# Altium PCB Strain gauge.PcbDoc
Units mil, origin at the board's own origin, x right, y up, seen from the top; angles counter-clockwise.
Board outline 2887.01 x 1499.61 mil, 2 copper layers (Top, Bottom); 10 components, 20 nets, 88 pads, 0 vias.
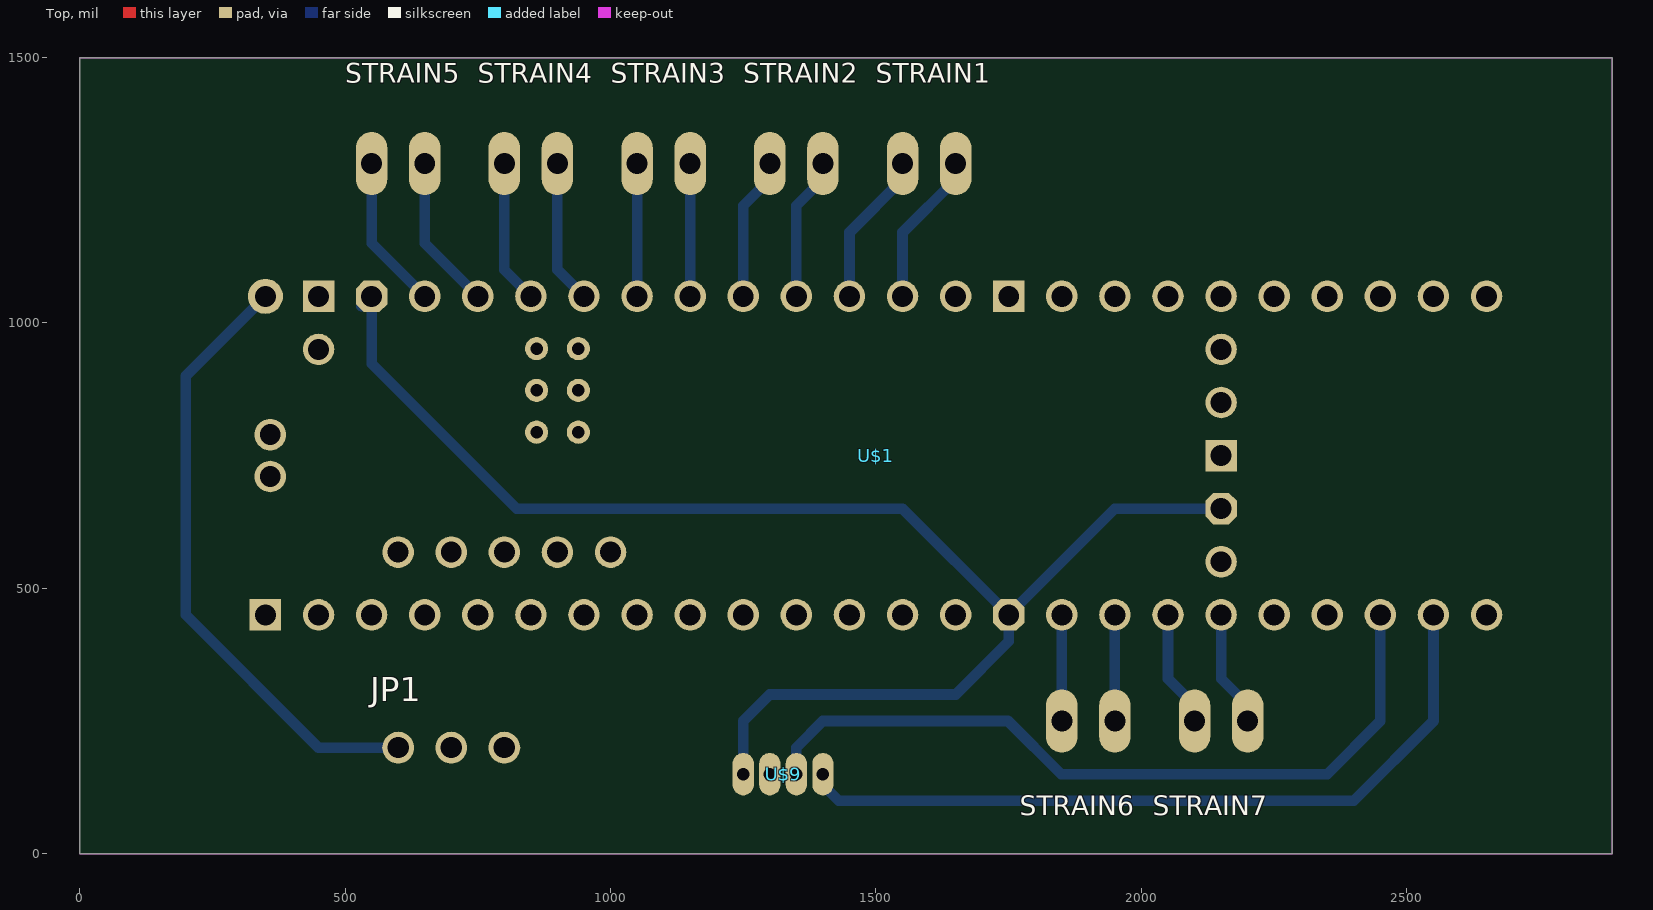
[diagram p0: Top view]
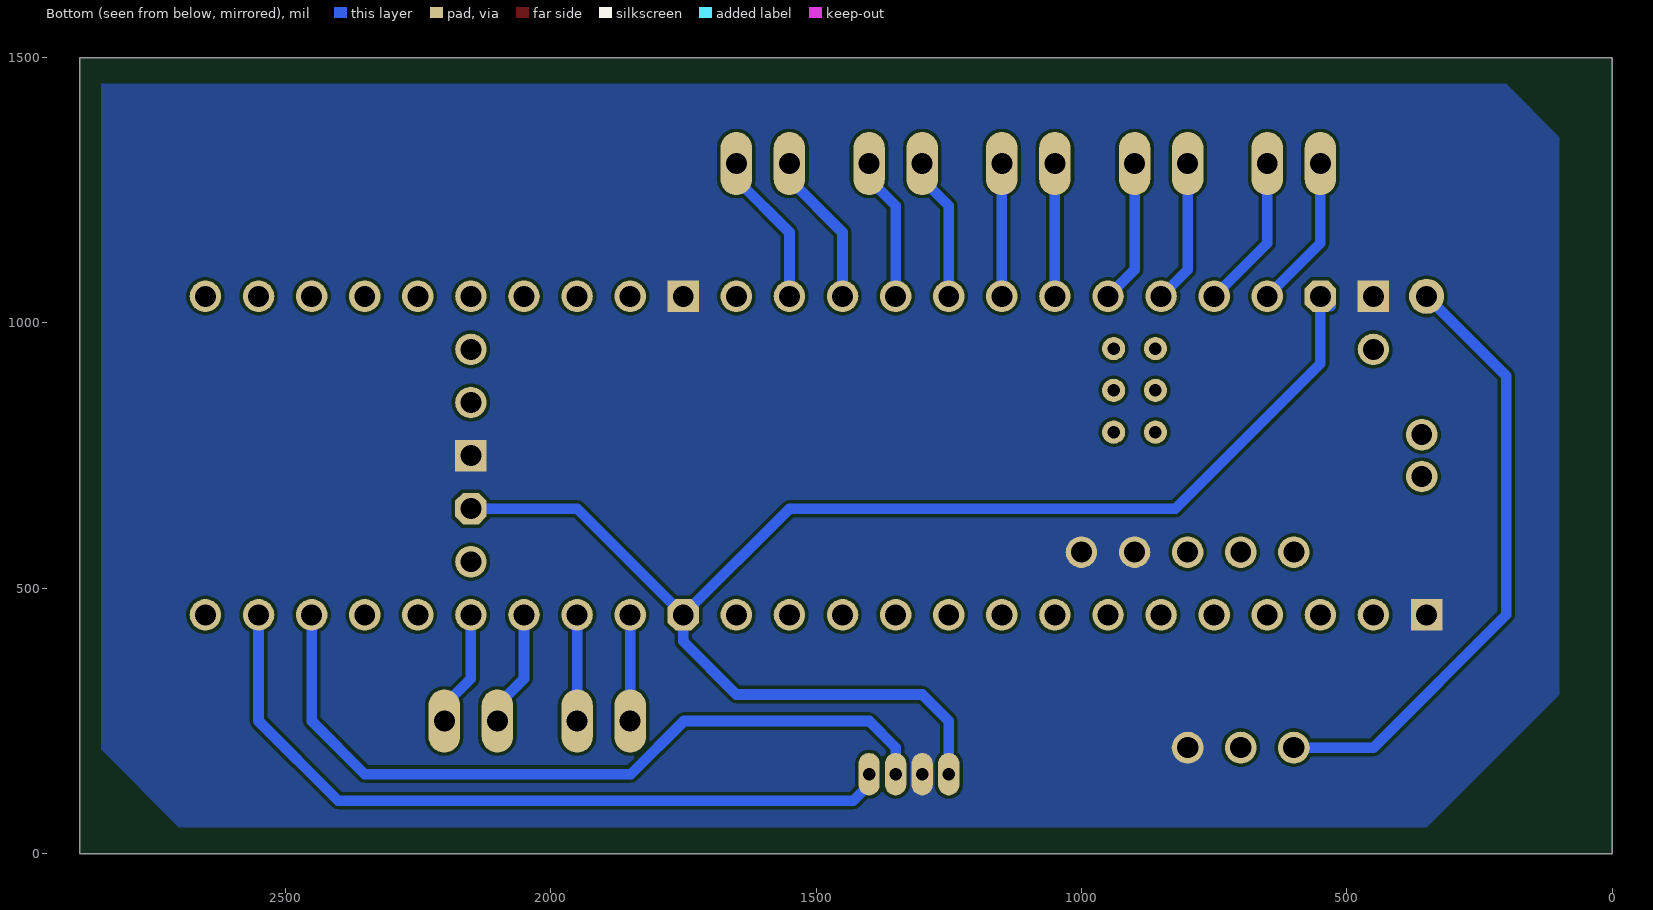
[diagram p1: Bottom view, seen from below]

## Layer stack, top to bottom
Top Solder: solder mask 0.4, Solder Resist, Dk 3.5
Top: signal copper 1.378
Dielectric 1: dielectric 12.6, FR-4, Dk 4.8
Bottom: signal copper 1.378
Bottom Solder: solder mask 0.4, Solder Resist, Dk 3.5

## Board outline
0,1499.61 0,0 2887.01,0 2887.01,1499.61

## Design rules (kind name [scope] priority, off if disabled: settings)
BoardOutlineClearance mdCopperDimension [All] p1: gap=10 ignorepadtopadclearanceinfootprint=FALSE except(0: Arc-SplitContinuation Track-SplitContinuation SMDPad-SplitContinuation THPad-SplitContinuation Via-SplitContinuation Fill-SplitContinuation Poly-SplitContinuation Region-SplitContinuation Text-SplitContinuation; 40: Poly-OutlineEdge Poly-CavityEdge Poly-CutoutEdge Poly-SplitBarrior)
Clearance "Clearance (Same Net)" [All] p1: gap=6 ignorepadtopadclearanceinfootprint=FALSE
Clearance [All] p2: gap=6 ignorepadtopadclearanceinfootprint=FALSE
HoleSize [All] p1: absolutevalues=TRUE maxlimit=100000 minlimit=13.78 maxpercent=80.000 minpercent=20.000
HoleToHoleClearance mdDrill [All] p1: gap=6 allowstackedmicrovias=TRUE
MinimumSolderMaskSliver [All] p1 off: minsoldermaskwidth=10
PasteMaskExpansion mlMinCreamFrame [All] p1: expansion=0
PolygonConnect PolygonConnect_For_PolygonThermal_ON_Width60000_Gap100000 [InPolygonClass('PolygonThermal_ON_Width60000_Gap100000') vs Not IsVia] p1: connectstyle=Relief reliefconductorwidth=6 reliefentries=4 polygonreliefangle="90 Angle" airgapwidth=10
PolygonConnect ThermalVias [IsVia] p2: connectstyle=Direct reliefconductorwidth=10 reliefentries=4 polygonreliefangle="90 Angle" airgapwidth=10
PolygonConnect [All] p3: connectstyle=Relief reliefconductorwidth=10 reliefentries=4 polygonreliefangle="90 Angle" airgapwidth=10
RoutingVias [All] p1: holewidth=13.78 width=29.78 viastyle="Through Hole" minholewidth=13.78 minwidth=29.78 maxholewidth=100 maxwidth=100
SolderMaskExpansion mlMinStopFrame [All] p1: expansion=4 istentingtop=FALSE
Width [All] p1: maxlimit=50 minlimit=12 preferedwidth=20 minimp=50.000000 maximp=50.000000 favimp=50.000000
26 further rules are at their usual default settings.

## Components (designator, comment, footprint, x,y, rotation, side; value= is the part's Value field where it differs from the comment)
JP1 "" 1X03 700,200 r0 top
STRAIN1 "22-23-2021" 22-23-2021 1600,1300 r0 top
STRAIN2 "22-23-2021" 22-23-2021 1350,1300 r0 top
STRAIN3 "22-23-2021" 22-23-2021 1100,1300 r0 top
STRAIN4 "22-23-2021" 22-23-2021 850,1300 r0 top
STRAIN5 "22-23-2021" 22-23-2021 600,1300 r0 top
STRAIN6 "22-23-2021" 22-23-2021 1900,250 r180 top
STRAIN7 "22-23-2021" 22-23-2021 2150,250 r180 top
U$1 "" TEENSY41 1550,750 r0 top
U$9 "" CAN_TEN 1150,100 r0 top

## Footprints (in the part's own frame and the unit in brackets; to place one, negate y for a bottom-side part, rotate by r counter-clockwise, add the part's x,y. Pads: shape width x height; smd on the part's side, far side on the other; paste and mask are expansions set on the pad)
1X03 [mil] "1X03"
  round 60 hole 40: 1(-100,0) 2(0,0) 3(100,0)
22-23-2021 [mm] "22-23-2021"
  oval 1.508x3.016 hole 1: 1(-1.27,0) 2(1.27,0)
CAN_TEN [mil] "CAN_TEN"
  oval 40x80 / inner oval 43.62x87.24 / far side oval 40x80 hole 23.62: P$1(100,50) P$2(150,50) P$3(200,50) P$4(250,50)
TEENSY41 [mm] "TEENSY41"
  round 1.508 hole 1: 0-RX1/CS1/CRX2(-27.94,-7.62) 1-TX1/MISO1/CTX2(-25.4,-7.62) 2-OUT2(-22.86,-7.62) 3-LRCLK2(-20.32,-7.62) 4-BCLK2(-17.78,-7.62) 5-IN2(-15.24,-7.62) 6-OUT1D(-12.7,-7.62) 7-RX2/OUT1A(-10.16,-7.62) 8-TX2/IN2(-7.62,-7.62) 9-OUT1C(-5.08,-7.62) 10-CS\MQSR(-2.54,-7.62) 11-MOSI/CTX1(0,-7.62) 12-MISO/MQSL(2.54,-7.62) 13-SCK/LED(2.54,7.62) 14-A0/TX3/SPDIF_OUT(0,7.62) 15-A1/RX3/SPDIF_IN(-2.54,7.62) 16-A2/RX4/SCL1(-5.08,7.62) 17-A3/TX4/SDA1(-7.62,7.62) 18-A4/SDA0(-10.16,7.62) 19-A5/SCL0(-12.7,7.62) 20-A6/TX5/LRCLK1(-15.24,7.62) 21-A7/RX5/BCLK1(-17.78,7.62) 22-A8/CTX1(-20.32,7.62) 23-A9/CRX1/MCLK1(-22.86,7.62) 24-A10/TX6/SCL2(7.62,-7.62) 25-A11/RX6/SDA2(10.16,-7.62) 26-A12/MOSI1(12.7,-7.62) 27-A13/SCK1(15.24,-7.62) 28-RX7(17.78,-7.62) 29-TX7(20.32,-7.62) 30-CRX3(22.86,-7.62) 31-CTX3(25.4,-7.62) 32-OUT1B(27.94,-7.62) 33-MCLK2(27.94,7.62) 34-RX8(25.4,7.62) 35-TX8(22.86,7.62) 36-PWM(20.32,7.62) 37-PWM(17.78,7.62) 38-A14/CS/IN1(15.24,7.62) 39-A15/CS/OUT1A(12.7,7.62) 40-A16/CS1(10.16,7.62) 41-A17/MISO1(7.62,7.62) +5V(-24.13,-4.62) D+(-30.25,-1) D-(-30.25,1) DM(-21.59,-4.62) DP(-19.05,-4.62) GND4(-16.51,-4.62) GND5(-13.97,-4.62) ON/OFF(15.24,5.08) PROGRAM(15.24,2.54) VBAT(15.24,-5.08) VUSB(-27.94,5.08)
  oct 1.508x1.508 / inner round 1.393 / far side oct 1.508x1.508 hole 1: 3V3-1(5.08,-7.62) 3V3-2(15.24,-2.54) 3V3-3(-25.4,7.62)
  round 1.108 hole 0.6: G(-15.51,3.12) LED(-17.51,3.12) R+(-17.51,5.12) R-(-15.51,5.12) T+(-15.51,1.12) T-(-17.51,1.12)
  rect 1.508x1.508 / inner round 1.393 / far side rect 1.508x1.508 hole 1: GND1(-30.48,-7.62) GND2(15.24,0) GND3(5.08,7.62) GND6(-27.94,7.62)
  round 1.676 hole 1: VIN(-30.48,7.62)

## Part data
JP1: library part PINHD-1X3, "PIN HEADER", DeviceSetName=PINHD-1X3, GateName_1=A, LibraryName=adafruit, SymbolName_1=PINHD3
STRAIN1 STRAIN2 STRAIN3 STRAIN4 STRAIN5 STRAIN6 STRAIN7: ".100\" (2.54mm) Center Header - 2 Pin", DeviceSetName=22-23-2021, GateName_1=-1, GateName_2=-2, LibraryName=con-molex, MF=MOLEX, MPN=22-23-2021, OC_FARNELL=1462926, OC_NEWARK=25C3832, POPULARITY=40, SymbolName_1=MV, SymbolName_2=M
U$1: library part TEENSY41, DeviceSetName=TEENSY41, GateName_1=G$1, LibraryName=teensy, SymbolName_1=TEENSY41, TEENSY4.1="TEENSY 4.1"
U$9: library part CAN_TEN, PackageName=CAN_TEN

## Nets (pads, with @x,y where several pads share a name; then routed paths per layer and width w, separated by ;. In a path a pad name is that pad's centre, name@x,y a point inside that pad or via, vN(x,y) a via of type N, cw(c..) or ccw(c..) an arc to the next point about the centre after c; other vN are vias at no path point)
3.3V: U$1.3V3-1 U$1.3V3-2 U$1.3V3-3 U$9.P$1 | length 2744.5
  Bottom w20: U$1.3V3-3@531,1031.54 549.46,1050 U$1.3V3-3 550,923.13 823.13,650 1550,650 U$1.3V3-1 ; U$9.P$1 1250,250 1300,300 1650,300 1750,400 U$1.3V3-1 ; U$1.3V3-2 1950,650 U$1.3V3-1
5V: JP1.1 U$1.VIN | length 1165.7
  Bottom w20: U$1.VIN 200,900 200,450 450,200 JP1.1
12V: JP1.2
CRX2: U$1.30-CRX3 U$9.P$3 | length 1453.6
  Bottom w20: U$9.P$3 1350,200 1400,250 1748.74,250 1848.74,150 2350,150 2450,250 U$1.30-CRX3
CTX2: U$1.31-CTX3 U$9.P$4 | length 1444.6
  Bottom w20: U$9.P$4 1400,130 1430,100 2400,100 2550,250 U$1.31-CTX3
GND: JP1.3 U$1.GND1 U$1.GND2 U$1.GND3 U$1.GND4 U$1.GND5 U$1.GND6 U$9.P$2
NetSTRAIN1_1: STRAIN1.1 U$1.15-A1/RX3/SPDIF_IN | length 291.4
  Bottom w20: U$1.15-A1/RX3/SPDIF_IN 1450,1170.32 1550,1270.32 STRAIN1.1
NetSTRAIN1_2: STRAIN1.2 U$1.14-A0/TX3/SPDIF_OUT | length 291.4
  Bottom w20: U$1.14-A0/TX3/SPDIF_OUT 1550,1170.32 1650,1270.32 STRAIN1.2
NetSTRAIN2_1: STRAIN2.1 U$1.17-A3/TX4/SDA1 | length 270.7
  Bottom w20: U$1.17-A3/TX4/SDA1 1250,1220.32 1300,1270.32 STRAIN2.1
NetSTRAIN2_2: STRAIN2.2 U$1.16-A2/RX4/SCL1 | length 270.7
  Bottom w20: U$1.16-A2/RX4/SCL1 1350,1220.32 1400,1270.32 STRAIN2.2
NetSTRAIN3_1: STRAIN3.1 U$1.19-A5/SCL0 | length 250
  Bottom w20: U$1.19-A5/SCL0 STRAIN3.1
NetSTRAIN3_2: STRAIN3.2 U$1.18-A4/SDA0 | length 250
  Bottom w20: U$1.18-A4/SDA0 STRAIN3.2
NetSTRAIN4_1: STRAIN4.1 U$1.21-A7/RX5/BCLK1 | length 270.7
  Bottom w20: STRAIN4.1 800,1100 U$1.21-A7/RX5/BCLK1
NetSTRAIN4_2: STRAIN4.2 U$1.20-A6/TX5/LRCLK1 | length 270.7
  Bottom w20: STRAIN4.2 900,1100 U$1.20-A6/TX5/LRCLK1
NetSTRAIN5_1: STRAIN5.1 U$1.23-A9/CRX1/MCLK1 | length 291.4
  Bottom w20: STRAIN5.1 550,1150 U$1.23-A9/CRX1/MCLK1
NetSTRAIN5_2: STRAIN5.2 U$1.22-A8/CTX1 | length 291.4
  Bottom w20: STRAIN5.2 650,1150 U$1.22-A8/CTX1
NetSTRAIN6_1: STRAIN6.1 U$1.25-A11/RX6/SDA2 | length 200
  Bottom w20: STRAIN6.1 U$1.25-A11/RX6/SDA2
NetSTRAIN6_2: STRAIN6.2 U$1.24-A10/TX6/SCL2 | length 200
  Bottom w20: STRAIN6.2 U$1.24-A10/TX6/SCL2
NetSTRAIN7_1: STRAIN7.1 U$1.27-A13/SCK1 | length 220.7
  Bottom w20: U$1.27-A13/SCK1 2150,329.69 2200,279.69 STRAIN7.1
NetSTRAIN7_2: STRAIN7.2 U$1.26-A12/MOSI1 | length 220.7
  Bottom w20: U$1.26-A12/MOSI1 2050,329.69 2100,279.69 STRAIN7.2
pads on no net: U$1.0-RX1/CS1/CRX2 U$1.1-TX1/MISO1/CTX2 U$1.2-OUT2 U$1.3-LRCLK2 U$1.4-BCLK2 U$1.5-IN2 U$1.6-OUT1D U$1.7-RX2/OUT1A U$1.8-TX2/IN2 U$1.9-OUT1C U$1.10-CS\MQSR U$1.11-MOSI/CTX1 U$1.12-MISO/MQSL U$1.13-SCK/LED U$1.28-RX7 U$1.29-TX7 U$1.32-OUT1B U$1.33-MCLK2 U$1.34-RX8 U$1.35-TX8 U$1.36-PWM U$1.37-PWM U$1.38-A14/CS/IN1 U$1.39-A15/CS/OUT1A U$1.40-A16/CS1 U$1.41-A17/MISO1 U$1.+5V U$1.D+ U$1.D- U$1.DM U$1.DP U$1.G U$1.LED U$1.ON/OFF U$1.PROGRAM U$1.R+ U$1.R- U$1.T+ U$1.T- U$1.VBAT U$1.VUSB

## Polygon pours and split planes (outlines as drawn)
GND on Bottom "GND_L02_P000" (solid, pour order 0): 2850,1450 200,1450 100,1350 100,300 350,50 2700,50 2850,200

## Keep-outs
Keep-Out Layer:
  the board outline again, w0

## Silkscreen, mask and mechanical layers (free items; w line width, h text height)
Dimension:
  the board outline again, w0

## Text inside footprints (layer, text, board x,y; h text height)
U$1: tPlace "POGO" at 420.78,703.76 h37.2 r90; tPlace "COIN CEL" at 1960,533 h37.2; tPlace "3 VOLT" at 1995,560 h37.2; tPlace "USB" at 459.89,705.74 h49.6 r90; tPlace "TEENSY 4.1" at 1250,750 h77.5